# Altium PCB Synthesizer.PcbDoc (part 2 of 2)
Units mm, origin at the board's own origin, x right, y up, seen from the top; angles counter-clockwise.
Board outline 62.91 x 80 mm, 4 copper layers (Top, GND, Power, Bottom), stack 1.782 mm thick; 89 components, 58 nets, 323 pads, 295 vias.
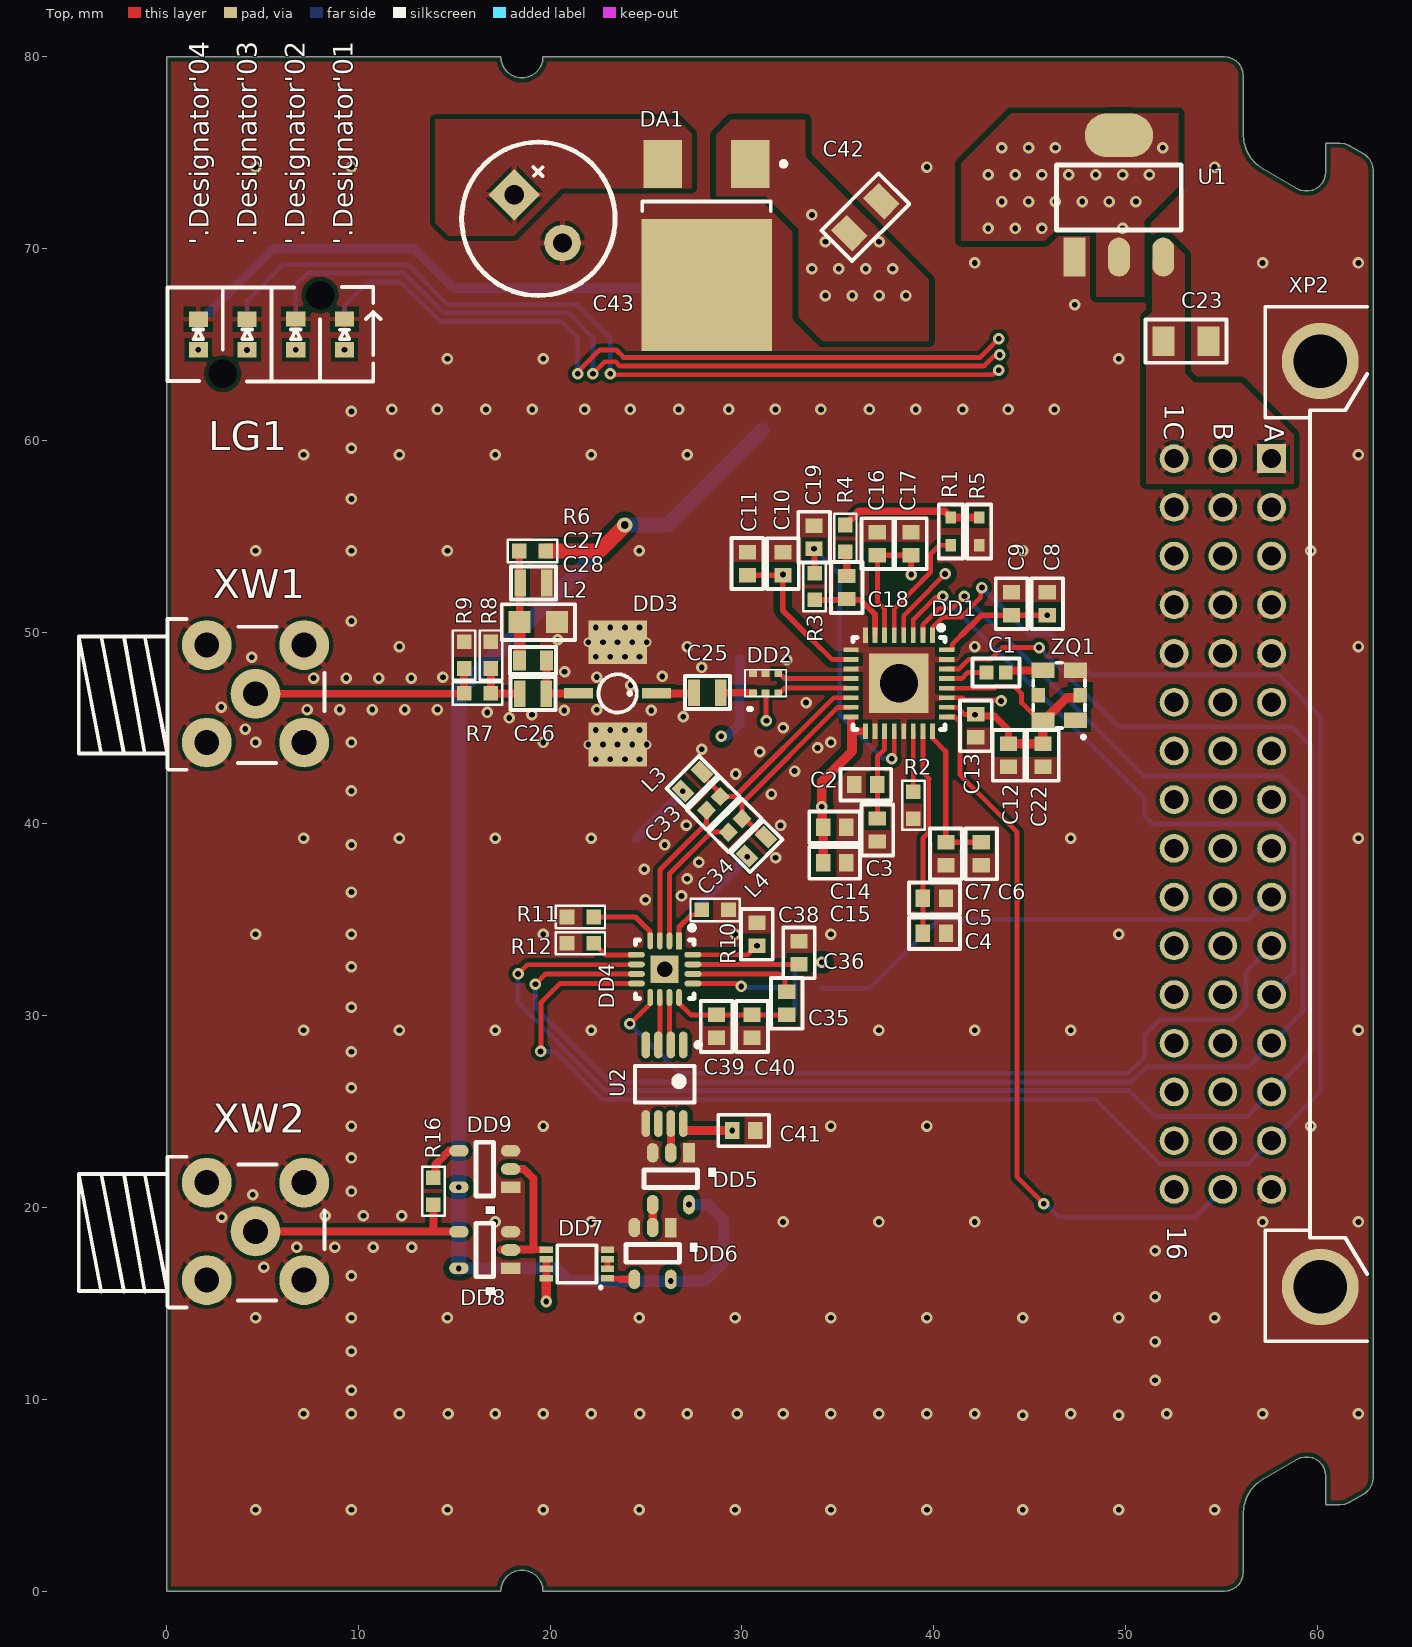
[diagram p0: Top view]

## Via types
v1: diameter 0.6, hole 0.3, Top to Bottom, tented both sides, 268 vias
v2: diameter 0.5, hole 0.3, Top to Bottom, tented both sides, 26 vias
v3: diameter 0.8, hole 0.4, Top to Bottom, tented both sides, 1 vias

## Nets (pads, with @x,y where several pads share a name; then routed paths per layer and width w, separated by ;. In a path a pad name is that pad's centre, name@x,y a point inside that pad or via, vN(x,y) a via of type N, cw(c..) or ccw(c..) an arc to the next point about the centre after c; other vN are vias at no path point) (continued)
SYNC: (continued)
  Power w0.25: XP2.a10@57.607,36.078 XP2.a10
  Bottom w0.26: R14.2 36.65,31.432 40.241,35.023 56.37,35.023 57.537,36.19 XP2.a10
pads on no net: LG1.MH U2.1 U2.4 U2.6 XP2.a3 XP2.a6 XP2.a7 XP2.a8 XP2.a9 XP2.b3 XP2.b6 XP2.b7 XP2.b8 XP2.b9 XP2.b10 XP2.b11 XP2.b12 XP2.b13 XP2.b14 XP2.b15 XP2.c3 XP2.c7 XP2.c9 XP2.c11 XP2.c12 XP2.c13 XP2.c14 XP2.c15 XP2.c16 ZQ1.1 ZQ1.5

## Polygon pours and split planes (outlines as drawn)
GND on Top "Top-GND" (solid, remove dead copper, pour order 40): 62.907,79.86 62.989,79.942 62.974,79.957 0,79.957 0,0.043 62.566,0.043 62.652,-0.043 62.907,0.212 62.907,57.445
+6V on Top "+6V_L01_P-001" (solid, pour order 37): 51.079,57.75 58.757,57.75 58.757,60.283 56.04,63 53.584,63 53.089,63.495 53.089,69.68 52.366,70.403 51.39,69.428 51.39,66.711 51.079,66.399
+6V on Top "+3.3V_L01_P-001" (solid, pour order 38): 31.233,72.73 28.653,72.73 28.653,75.933 29.433,76.713 33.309,76.713 33.309,74.787 39.733,68.364 39.733,65.174 34.197,65.174 32.959,66.413 32.959,71.004
+5V on Top "+3.3V_L01_P-001" (solid, pour order 35): 18.117,70.663 20.603,73.149 27.38,73.149 27.38,75.993 26.623,76.75 14,76.75 14,71.356 14.693,70.663
+3.3V on Top "+3.3V_L01_P-001" (solid, pour order 34): 48.472,67.498 50.976,67.498 50.976,71.45 52.755,73.229 52.755,77.048 44.038,77.048 41.432,74.442 41.432,70.403 45.797,70.403 46.402,71.008 46.433,70.977 48.472,70.977
no net on Top Solder "Top Solder-No Net" (solid): 50.986,9.749 50.986,61.085 50.985,61.085 50.985,61.174 11.263,61.175 10.032,61.175 10.032,48.411 12.547,48.411 12.547,58.66 48.472,58.66 48.472,12.25 12.547,12.25 12.547,17.277 10.032,17.277 10.032,11.205 10.032,9.75
GND on Top Solder "TOP_SOLDER_BORDER" (solid): 0,80.045 62.998,80.043 63.013,80.028 63.013,0.043 0,0.043 0,2.253 61.423,2.253 61.423,77.843 0,77.843
no net on Top Solder "Top Solder-No Net" (solid): 6.346,45.1 8.004,45.1 8.475,45.57 21.595,45.57 25.275,45.57 28.151,45.57 28.151,45.569 29.464,45.569 29.549,45.569 29.549,46.195 30.778,46.195 30.778,47.332 30.176,47.332 30.176,48.011 28.151,48.011 28.151,48.01 25.275,48.01 21.595,48.01 20.282,48.01 20.194,48.097 18.136,48.097 18.048,48.01 8.475,48.01 7.835,48.649 6.515,48.649 5.875,48.01 4.588,48.01 4.588,45.57 5.875,45.57
no net on Top Solder "Top Solder-No Net" (solid): 13.328,19.458 13.328,19.979 8.522,19.979 7.882,20.619 6.562,20.619 5.922,19.979 4.635,19.979 4.635,17.54 5.922,17.54 6.393,17.069 8.051,17.069 8.522,17.54 14.322,17.54 14.322,19.458
no net on Top Solder "Top Solder-No Net" (solid): 26.55,35.023 27.032,35.505 27.032,36.757 35.048,44.773 35.048,45.95 34.693,46.304 34.693,48.071 34.64,48.123 34.45,48.123 33.992,48.582 31.893,48.582 31.893,45.923 32.748,45.923 24.655,37.83 24.655,36.426 24.655,35.643 25.275,35.023
no net on Top Solder "Top Solder_P3" (solid): 10.032,45.189 10.032,20.238 12.547,20.238 12.547,45.189
GND on Bottom "+3.3V_L01_P-001" (solid, remove dead copper, pour order 41): 0,80.045 62.995,80.045 62.998,80.043 62.989,80.034 62.989,-0.043 0.086,-0.043 0,0.043
+6V on Bottom "+3.3V_L01_P-001" (solid, pour order 36): 59.247,57.75 29.66,57.75 28.486,58.924 28.486,62.695 28.486,72.39 37.496,72.39 44.579,65.306 48.701,61.184 59.247,61.184
+3.3V on Bottom "+3.3V_L01_P-001" (solid, pour order 39): 44.429,68.539 41.432,71.394 41.432,74.451 43.481,76.5 52.755,76.5 52.755,73.232 51.069,71.547 51.069,67.498 50.257,67.498 49.216,68.539
+3.3V on Power "+3.3V_L03_P042" (solid, remove dead copper, pour order 42): 0,80 63,80 63,0 0,0
+5V on Power "+3.3V_L01_P-001" (solid, pour order 33): 21.595,73.852 16.648,68.905 16.648,37.928 20.007,34.57 31.893,34.57 31.893,25.179 29.302,22.588 12.758,22.588 7.613,27.734 7.613,70.546 13,75.933 19.514,75.933
no net on Bottom Solder "BOT_SOLDER_BORDER" (solid): 0,79.957 62.974,79.957 62.989,79.942 62.989,-0.043 0,-0.043 0,2.167 61.399,2.167 61.399,77.8 0,77.8
GND on GND "GND_L02_P032" (solid, remove dead copper, pour order 32): 0,80 63,80 63,0 0,0

## Other copper
Top:
  pour cut-out: 27.798,47.718 28.598,47.718 28.598,45.943 27.798,45.943
  pour cut-out: 19.46,45.89 18.753,45.89 18.753,49.593 19.46,49.593
  pour cut-out: 15.893,48.689 16.528,48.689 16.528,46.228 15.893,46.228
Bottom:
  pour cut-out: 30.218,44.569 30.218,46.195 30.928,46.195 30.928,44.569

## Silkscreen, mask and mechanical layers (free items; w line width, h text height)
Bottom Overlay:
  lines w0.1: 31.563,29.02 31.563,33.72 39.5,33.72 39.5,29.02 31.563,29.02
  text "Trig" at 38.823,30.361 h0.5 r270
  text "Не паять вместе" at 37.323,29.564 h1 r270
Top Solder:
  pour cut-out: 30.777,40.502 29,42.279 28.821,42.1 30.597,40.323
  pour cut-out: 27.304,40.547 29.127,38.725 29.306,38.904 27.484,40.726
  pour cut-out: 34.87,46.771 34.87,44.142 35.25,44.142 35.25,46.771
  pour cut-out: 17.932,45.564 17.932,48.054 17.494,48.054 17.494,45.564
  pour cut-out: 29.398,48.011 29.398,45.382 29.745,45.382 29.745,48.011
  pour cut-out: 20.282,48.054 20.282,45.564 26.774,45.564 26.774,48.054
  pour cut-out: 14.979,49.086 16.09,49.086 16.096,49.08 16.096,48.657 14.963,48.657 14.931,48.689
PCB Outline:
  lines w0.2: 0,0.048 17.425,0.048 17.449,0.277 17.52,0.495 17.635,0.694 17.789,0.865 17.975,1 18.185,1.094 18.41,1.142 18.64,1.142 18.865,1.094 19.075,1 19.261,0.865 19.415,0.694 19.53,0.495 19.601,0.277 19.625,0.048 55.139,0.048 55.361,0.073 55.573,0.147 55.762,0.266 55.92,0.424 56.04,0.614 56.114,0.825 56.139,1.048 56.139,4.144 56.182,4.559 56.312,4.957 56.521,5.319 56.8,5.63 57.139,5.876 58.937,6.914 59.128,6.999 59.332,7.042 59.541,7.042 59.746,6.999 59.937,6.914 60.106,6.791 60.246,6.636 60.35,6.455 60.415,6.256 60.437,6.048 60.437,4.548 61.169,4.548 61.428,4.582 61.669,4.682 62.407,5.108 62.576,5.231 62.716,5.386 62.82,5.567 62.885,5.766 62.907,5.974 62.907,74.122 62.885,74.33 62.82,74.528 62.716,74.71 62.576,74.865 62.407,74.988 61.669,75.414 61.428,75.514 61.169,75.548 60.437,75.548 60.437,74.048 60.415,73.84 60.35,73.641 60.246,73.46 60.106,73.305 59.937,73.182 59.746,73.097 59.541,73.053 59.332,73.053 59.128,73.097 58.937,73.182 57.139,74.22 56.8,74.466 56.521,74.776 56.312,75.138 56.182,75.536 56.139,75.952 56.139,79.048 56.114,79.27 56.04,79.482 55.92,79.671 55.762,79.83 55.573,79.949 55.361,80.023 55.139,80.048 19.625,80.048 19.601,79.819 19.53,79.6 19.415,79.401 19.261,79.23 19.075,79.095 18.865,79.002 18.64,78.954 18.41,78.954 18.185,79.002 17.975,79.095 17.789,79.23 17.635,79.401 17.52,79.6 17.449,79.819 17.425,80.048 0,80.048 0,0.048

## Text inside footprints (layer, text, board x,y; h text height)
XP2: Top Overlay "A" at 57.251,60.832 h1 r270; Top Overlay "B" at 54.598,60.922 h1 r270; Top Overlay "C" at 52.008,60.971 h1 r270; Top Overlay "1" at 52.048,61.918 h1 r270; Top Overlay "16" at 52.16,19.039 h1 r270; Bottom Overlay "A" at 57.237,60.207 h1 r270; Bottom Overlay "B" at 54.572,60.284 h1 r270; Bottom Overlay "C" at 52.01,60.297 h1 r270; Bottom Overlay "1" at 50.104,58.871 h1 r270; Bottom Overlay "8" at 50.203,40.851 h1 r270; Bottom Overlay "16" at 50.127,20.112 h1 r270; Comments "PCB edge" at 63.699,48.589 h2 r270
XW1: Comments "INTERFACE" at -20.461,34.231 h1; Comments "CONNECTOR FRONT" at -20.361,35.631 h1
XW2: Comments "CONNECTOR FRONT" at -20.361,7.601 h1; Comments "INTERFACE" at -20.461,6.201 h1